# EAGLE board IQOV-162_Evo_Board (EAGLE 9.7.0)
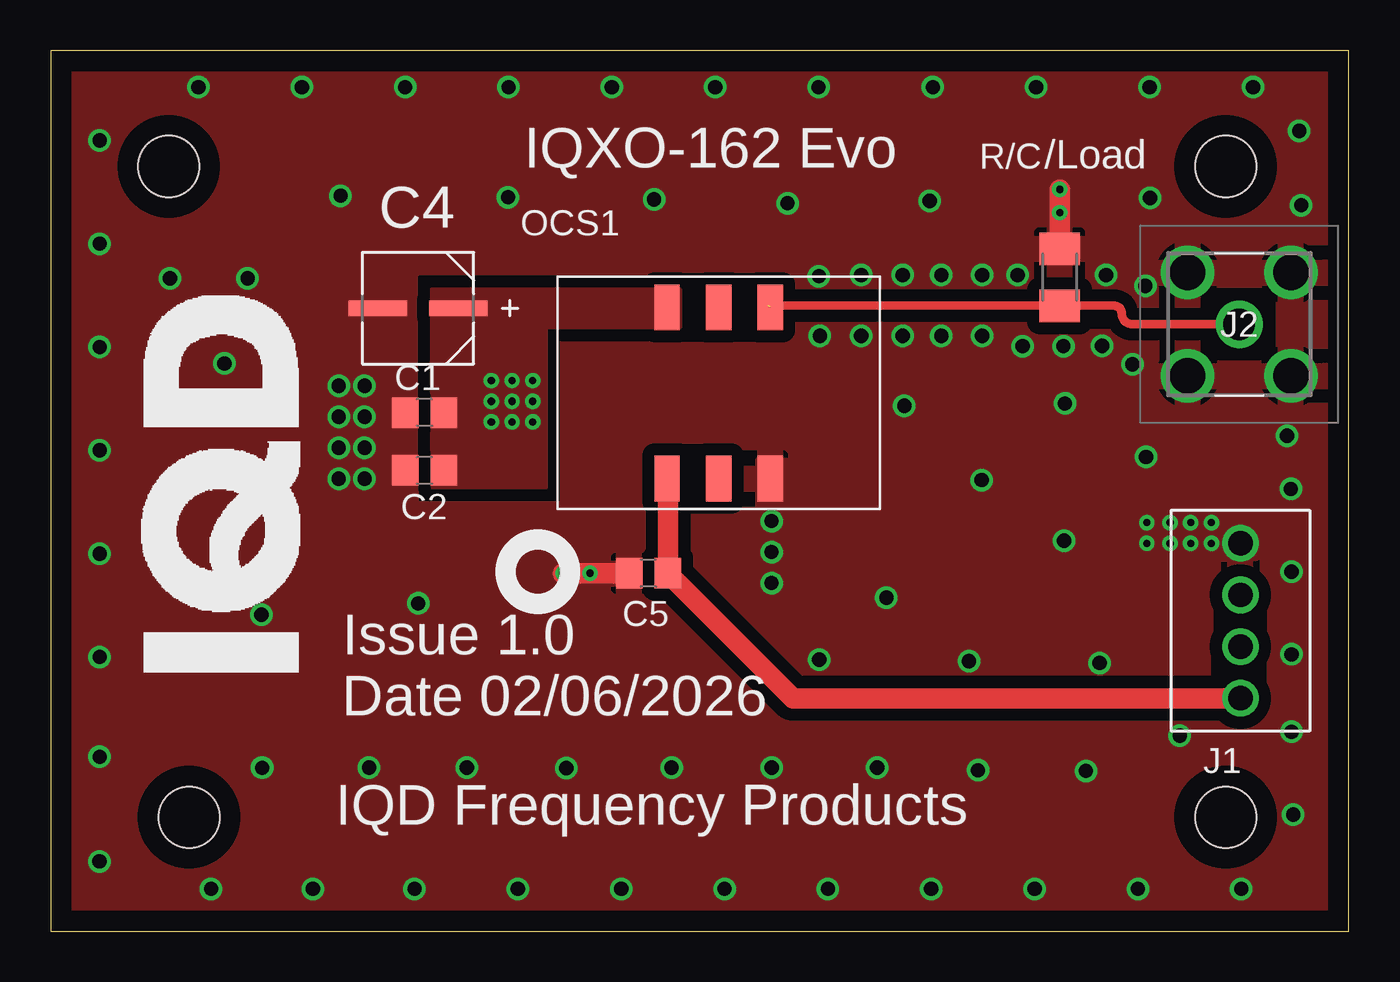
[diagram p0: board, top side]
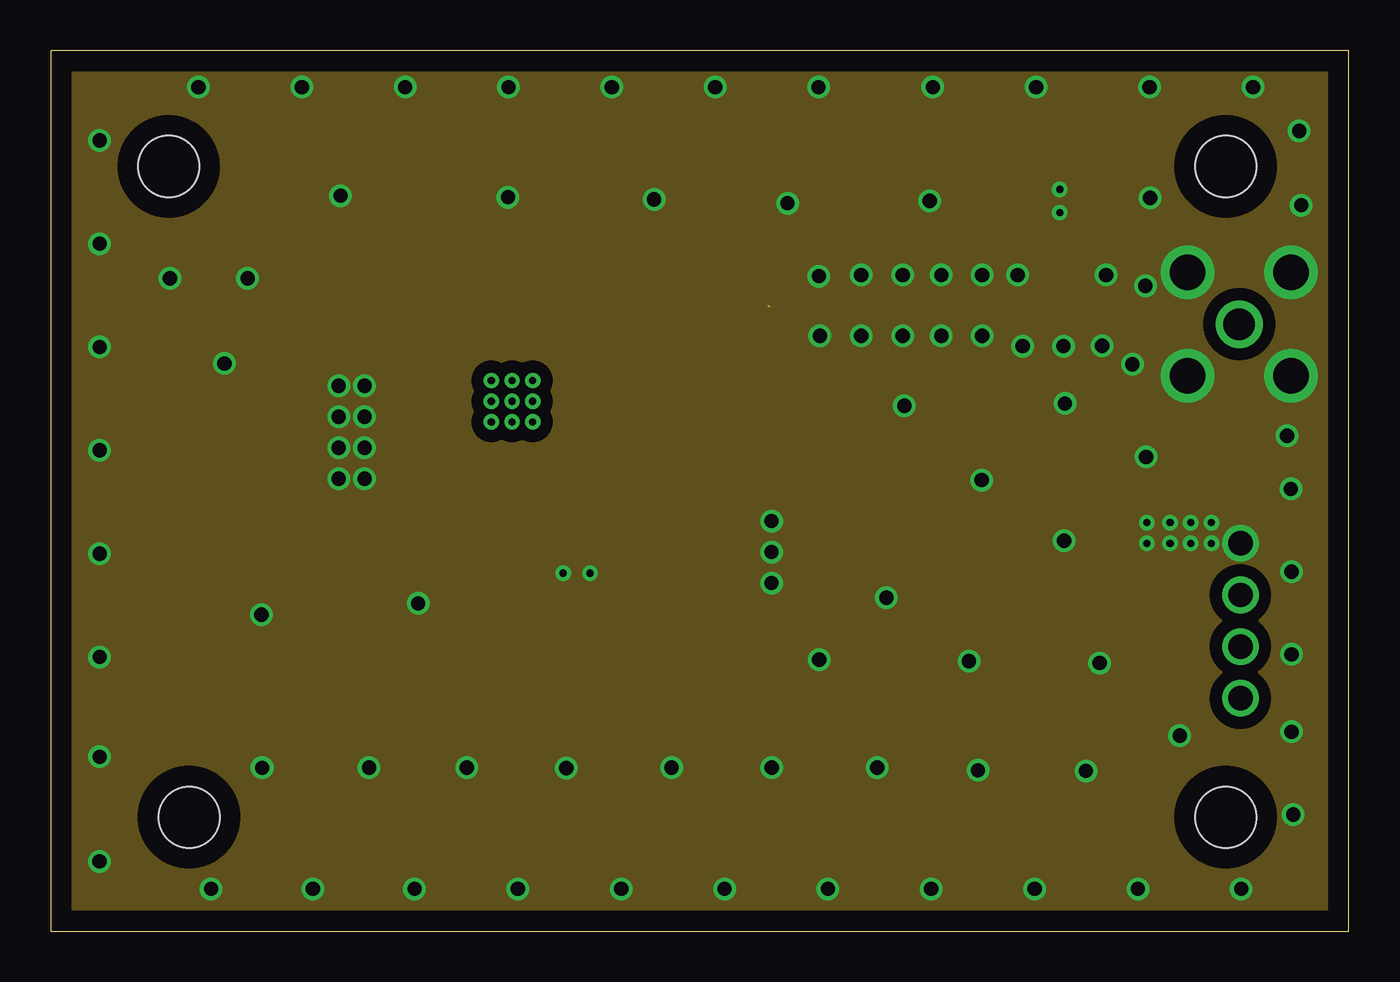
[diagram p1: board, inner layer Route2]
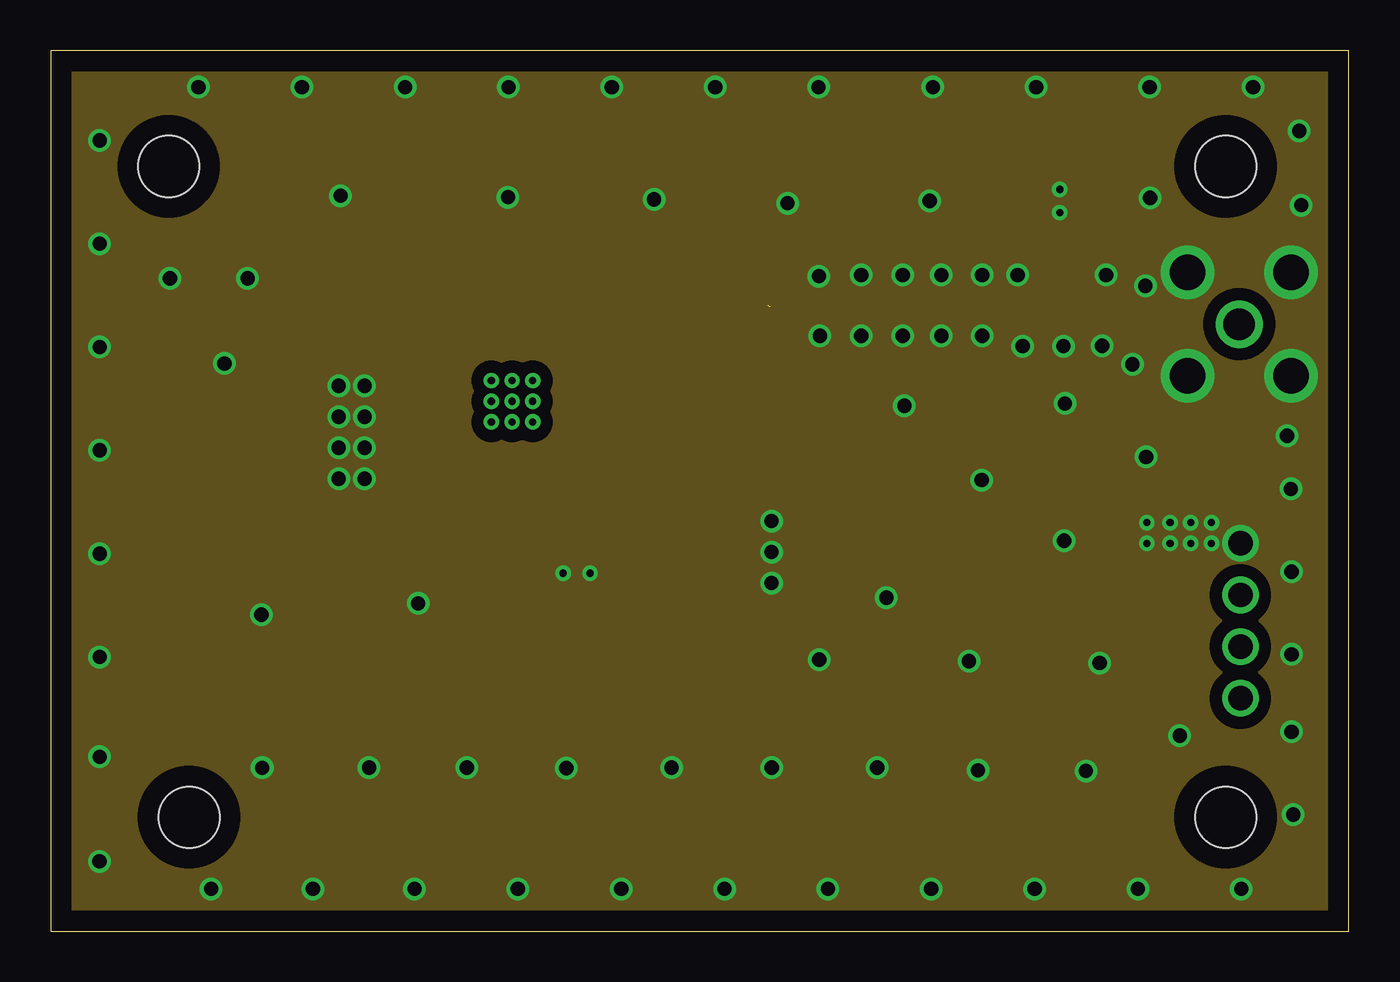
[diagram p2: board, inner layer Route15]
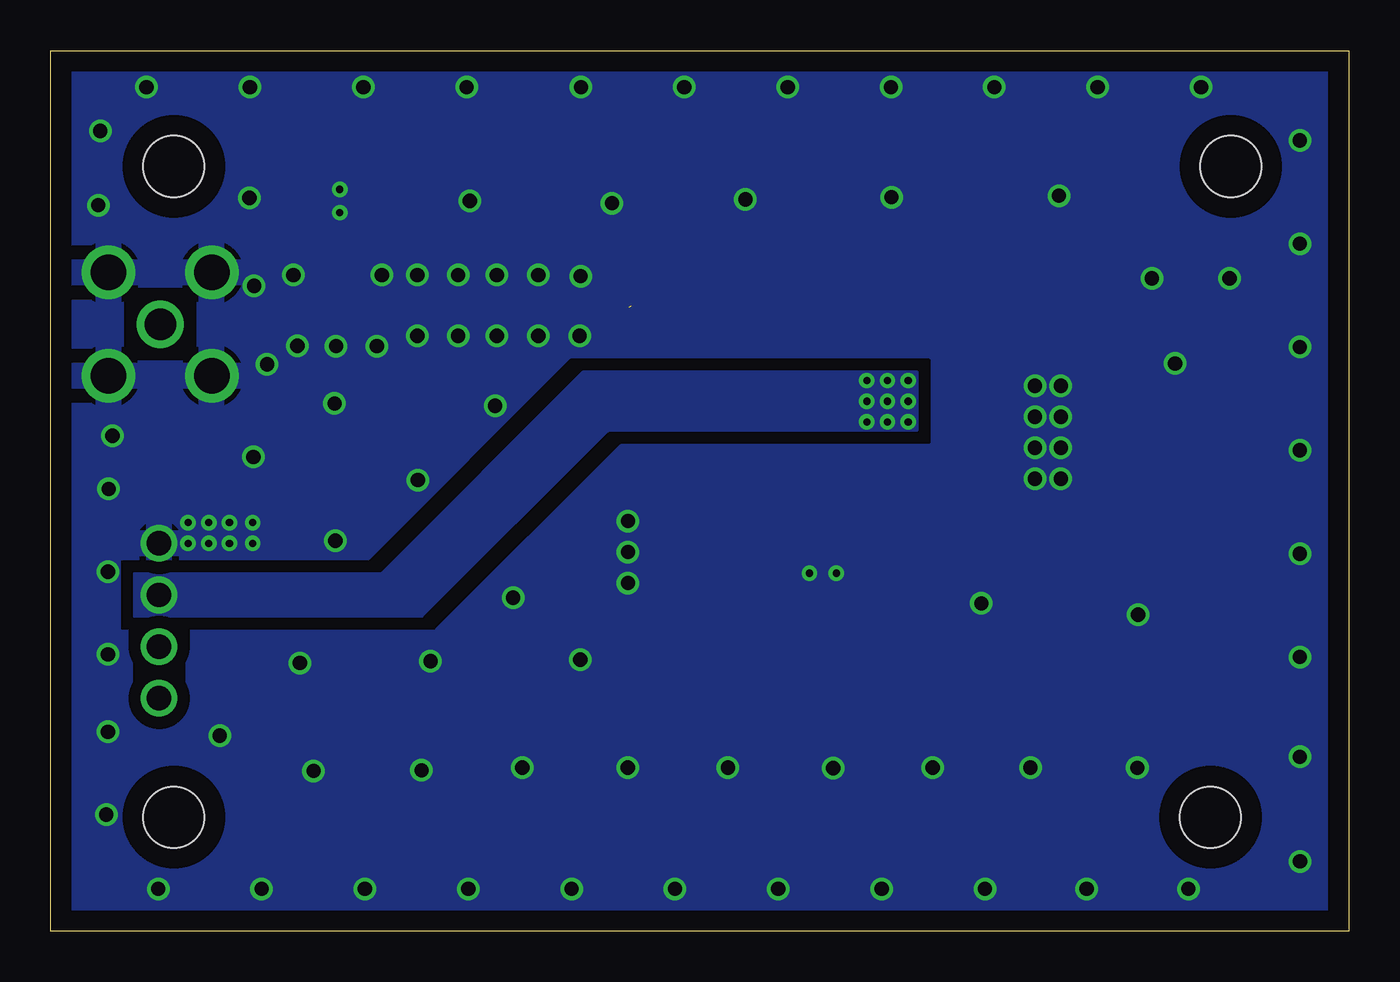
[diagram p3: board, bottom side, seen from below]

Size 63.8 x 43.28 mm. Coordinates in mm from the lower left corner, seen from the top.
Outline: 0,0 63.8,0 63.8,43.28 0,43.28 0,0
Copper layers (1+2*15+16): Top 0.035mm / dielectric 1.5mm / Route2 0.035mm / dielectric 0.15mm / Route15 0.035mm / dielectric 0.2mm / Bottom 0.035mm
Design rules "Fusion Electronics Design Rules *": minimum track width 6mil, minimum drill 0.35mm, track to track 0.6mm, track to pad 0.6mm, pad to pad 6mil, via to via 6mil, smd to smd 6mil, copper to edge 40mil, drill to drill 6mil, minimum pad ring 10mil, minimum via ring 8mil, stop-mask expansion 4mil, vias tented up to drill 0mil, thermal gap 10mil
Holes 3 mm at 5.79,37.6 6.79,5.6 57.75,5.6 57.75,37.6

## Footprints (pad centres in the part's own frame; a part is rotated, then mirrored left to right if it is on the bottom)
C0805 = smd 1.3 x 1.5: 1 -0.95,0; 2 0.95,0
CAPAE530X610N = smd 2.87 x 0.762: 1 -1.981,0; 2 1.981,0
TERMBLK_254-4N = drill 1.2: 1 0,0; 2 2.54,0; 3 5.08,0; 4 7.62,0
60312002114503 = drill 1.55 pad 2.325: 1 0,0 | drill 1.75 pad 2.625: 2 -2.54,-2.54; 3 -2.54,2.54; 4 2.54,-2.54; 5 2.54,2.54
IQOV-162 = smd 2.25 x 1.25: P$1 -4.31,2.54; P$2 -4.31,0; P$3 -4.31,-2.54; P$4 4.11,-2.54; P$5 4.11,0; P$6 4.11,2.54
M1206 = smd 1.6 x 2: 1 -1.4,0; 2 1.4,0

## Placement (x,y rotation side)
C1  10uF  [C0805]  18.38,25.5 180 top
C2  100nF  [C0805]  18.38,22.65 180 top
C4  100UF  [CAPAE530X610N]  18.05,30.63 180 top
C5  100nF  [C0805]  29.38,17.6 180 top
J1  2828XX-4282834-4  [TERMBLK_254-4N]  58.48,19.07 270 top
J2  60311002114501  [60312002114503]  58.42,29.84 0 top
OCS1  IQOV-162  [IQOV-162]  32.83,26.56 90 top
R/C  49.9R  [M1206]  49.6,32.15 270 top

## Library data of the parts
C1 C2 C5 R/C = resistor
C4 = Panasonic-EEEFK_EEEFP; MPN: EEE-FK0J101UR; OC_FARNELL: 1850085; OC_NEWARK: 23T0829; PACKAGE: CASE-C; SUPPLIER: PANASONIC; TOLERANCE: ±20 %; VOLTAGERATING: 6.3V
J1 = Connector; CATEGORY: Connectors; DATASHEET: https://www.te.com/usa-en/product-282834-4.datasheet.pdf; DESCRIPTION: 4 Position Wire to Board Terminal Block Horizontal with Board 0.100" (2.54mm) Through Hole; MANUFACTURER: TE Connectivity AMP Connectors; MPN: 282834-4; OPERATING_TEMPERATURE: -40°C ~ 105°C; PACKAGE_SIZE: NA; PACKAGE_TYPE: Through Hole; PART_STATUS: Active; PITCH: 0.100" (2.54mm); ROHS: Compliant; SERIES: Buchanan; SUBCATEGORY: Terminal Blocks; TYPE: Screw Terminal - Rising Cage Clamp Side Wire Entry
J2 = 60312002114503; DESCRIPTION: Wurth Elektronik, WR-SMA Straight PCB Mount Coaxial Connector, jack, Gold over Nickel, Solder Termination; HEIGHT: 9.56mm; MANUFACTURER_NAME: Wurth Elektronik; MANUFACTURER_PART_NUMBER: 60312002114503; MOUSER_PART_NUMBER: 710-60312002114503; MOUSER_PRICE-STOCK: https://www.mouser.co.uk/ProductDetail/Wurth-Elektronik/60312002114503?qs=3jNSNtuqJTL%2FGpZA1FAOxw%3D%3D
OCS1 = IQD-Frequency-Products

## Nets
GND: C1.2 C2.2 C4.2 C5.2 J1.1 J2.2 J2.3 J2.4 J2.5 OCS1.P$3 R/C.1
N$2: J2.1 OCS1.P$4 R/C.2
N$6: C5.1 J1.4 OCS1.P$1
VCC: C1.1 C2.1 C4.1 J1.2 OCS1.P$6

## Tracks (layer width: path | path; a pad name or v marks a point on that pad's centre or on a via)
GND  (via drill 0.35, 0.7)
  Top 1.016: R/C.1 v49.6,36.47 | v25.19,17.6 C5.2
  other vias: 2.4,38.88 2.4,33.8 2.4,28.72 2.4,23.64 2.4,18.56 2.4,13.48 17.88,2.08 22.96,2.08 28.04,2.08 33.12,2.08 38.2,2.08 43.28,2.08 48.36,2.08 53.44,2.08 58.52,2.08 49.82,19.2 61.07,5.73 60.99,9.8 60.99,13.61 60.99,17.67 48.44,41.5 43.36,41.5 37.74,41.5 32.66,41.5 27.58,41.5 22.5,41.5 17.42,41.5 12.34,41.5 41.96,25.83 36.22,35.79 20.45,8.04 35.44,8.04 49.85,25.95 43.78,29.27 45.78,29.27 47.78,28.76 49.78,28.76 43.78,32.26 45.78,32.26 47.52,32.26 7.26,41.5 59.1,41.5 54.02,41.5 61.37,39.35 12.88,2.08 7.88,2.08 14.24,36.16 40.63,8.04 54.04,36.05 45.76,22.18 22.47,36.09 25.34,8.02 30.52,8.04 15.64,8.04 51.56,13.19 45.58,7.91 45.13,13.28 37.77,13.35 53.17,27.88 60.77,24.35 51.88,32.26 60.96,21.74 61.47,35.69 15.42,23.77 53.85,23.32 18.06,16.12 55.5,9.61 53.88,19.07 53.81,31.73 51.68,28.77 49.6,35.32 55.02,19.07 41.87,32.26 41.87,29.27 35.43,18.64 35.43,20.16 5.86,32.09 35.43,17.12 43.2,35.9 9.67,32.09 39.84,32.26 39.84,29.27 37.81,29.27 37.76,32.2 26.51,17.6 56.04,19.07 57.05,19.07 53.88,20.09 55.02,20.09 56.04,20.09 57.05,20.09 15.42,26.81 15.42,25.29 8.53,27.91 15.42,22.24 41.07,16.4 10.36,15.56 10.39,8.03 29.66,35.98 14.15,26.81 14.15,25.29 14.15,23.77 14.15,22.24 2.4,8.57 50.88,7.88 2.38,3.43
  pour Bottom (rank 2): 75.85,-23.43 75.82,-23.31 75.82,42.26 75.82,42.26 75.82,42.32 75.82,42.38 75.82,42.39 75.87,46.63 -21.32,46.63 -21.52,-28.1 75.89,-28.1 75.89,-23.54 75.87,-23.5
  pour Top (rank 2): -24.82,-33.34 81.7,-33.39 81.63,-29.93 81.63,-29.92 81.63,-29.87 81.62,-29.81 81.63,-29.8 81.63,50.18 -26.18,50.18
  pour Route2 (no thermals): -29.58,-37.62 87.11,-37.62 87.11,52.39 -29.58,52.39
  pour Route15 (no thermals): -32.12,-40.16 88.38,-40.16 88.38,54.93 -32.12,54.93
  pour Top (no thermals): 34.69,16.22 36.31,16.22 36.31,23.18 34.69,23.18
  pour Top (no thermals): 53.79,18.82 59.12,18.82 59.12,20.34 53.79,20.34
  pour Top (no thermals): 17.77,21.56 17.77,26.78 17.53,27.03 17.52,27.05 17.52,31.57 13.1,31.57 13.1,21.56
N$2  (1 unrouted)
  Top 0.406: 49.39,30.96 R/C.2 | R/C.2 52.27,30.75 arc-90 52.64,30.37 arc90 53.17,29.84 J2.1 | R/C.2 35.26,30.75
N$6
  Top 0.61: OCS1.P$1 30.33,22.22
  Top 1.016: J1.4 36.47,11.45 C5.1 30.33,22.22
VCC  (via drill 0.35)
  other vias: 21.66,27.07 22.67,27.07 23.69,27.07 21.66,26.05 22.67,26.05 23.69,26.05 21.66,25.04 22.67,25.04 23.69,25.04
  pour Top (no thermals): 18.68,29.69 30.98,29.69 30.98,31.57 18.68,31.57
  pour Top (no thermals): 18.68,21.81 24.37,21.81 24.37,31.57 18.68,31.57
  pour Bottom (no thermals): 36.4,24.61 36.43,24.59 45.56,15.46 59.68,15.46 59.68,17.6 47.55,17.6 47.52,17.61 37.63,27.5 21.22,27.5 21.22,24.61

## Text on the board
tPlace: IQXO-162 Evo | /Load | Issue 1.0 / Date 02/06/2026 | IQD Frequency Products